# Altium PCB Split_Pumps2026.PcbDoc
Units mil, origin at the board's own origin, x right, y up, seen from the top; angles counter-clockwise.
Board outline 1640 x 1640 mil, 2 copper layers (Top Layer, Bottom Layer); 5 components, 5 nets, 13 pads, 0 vias.
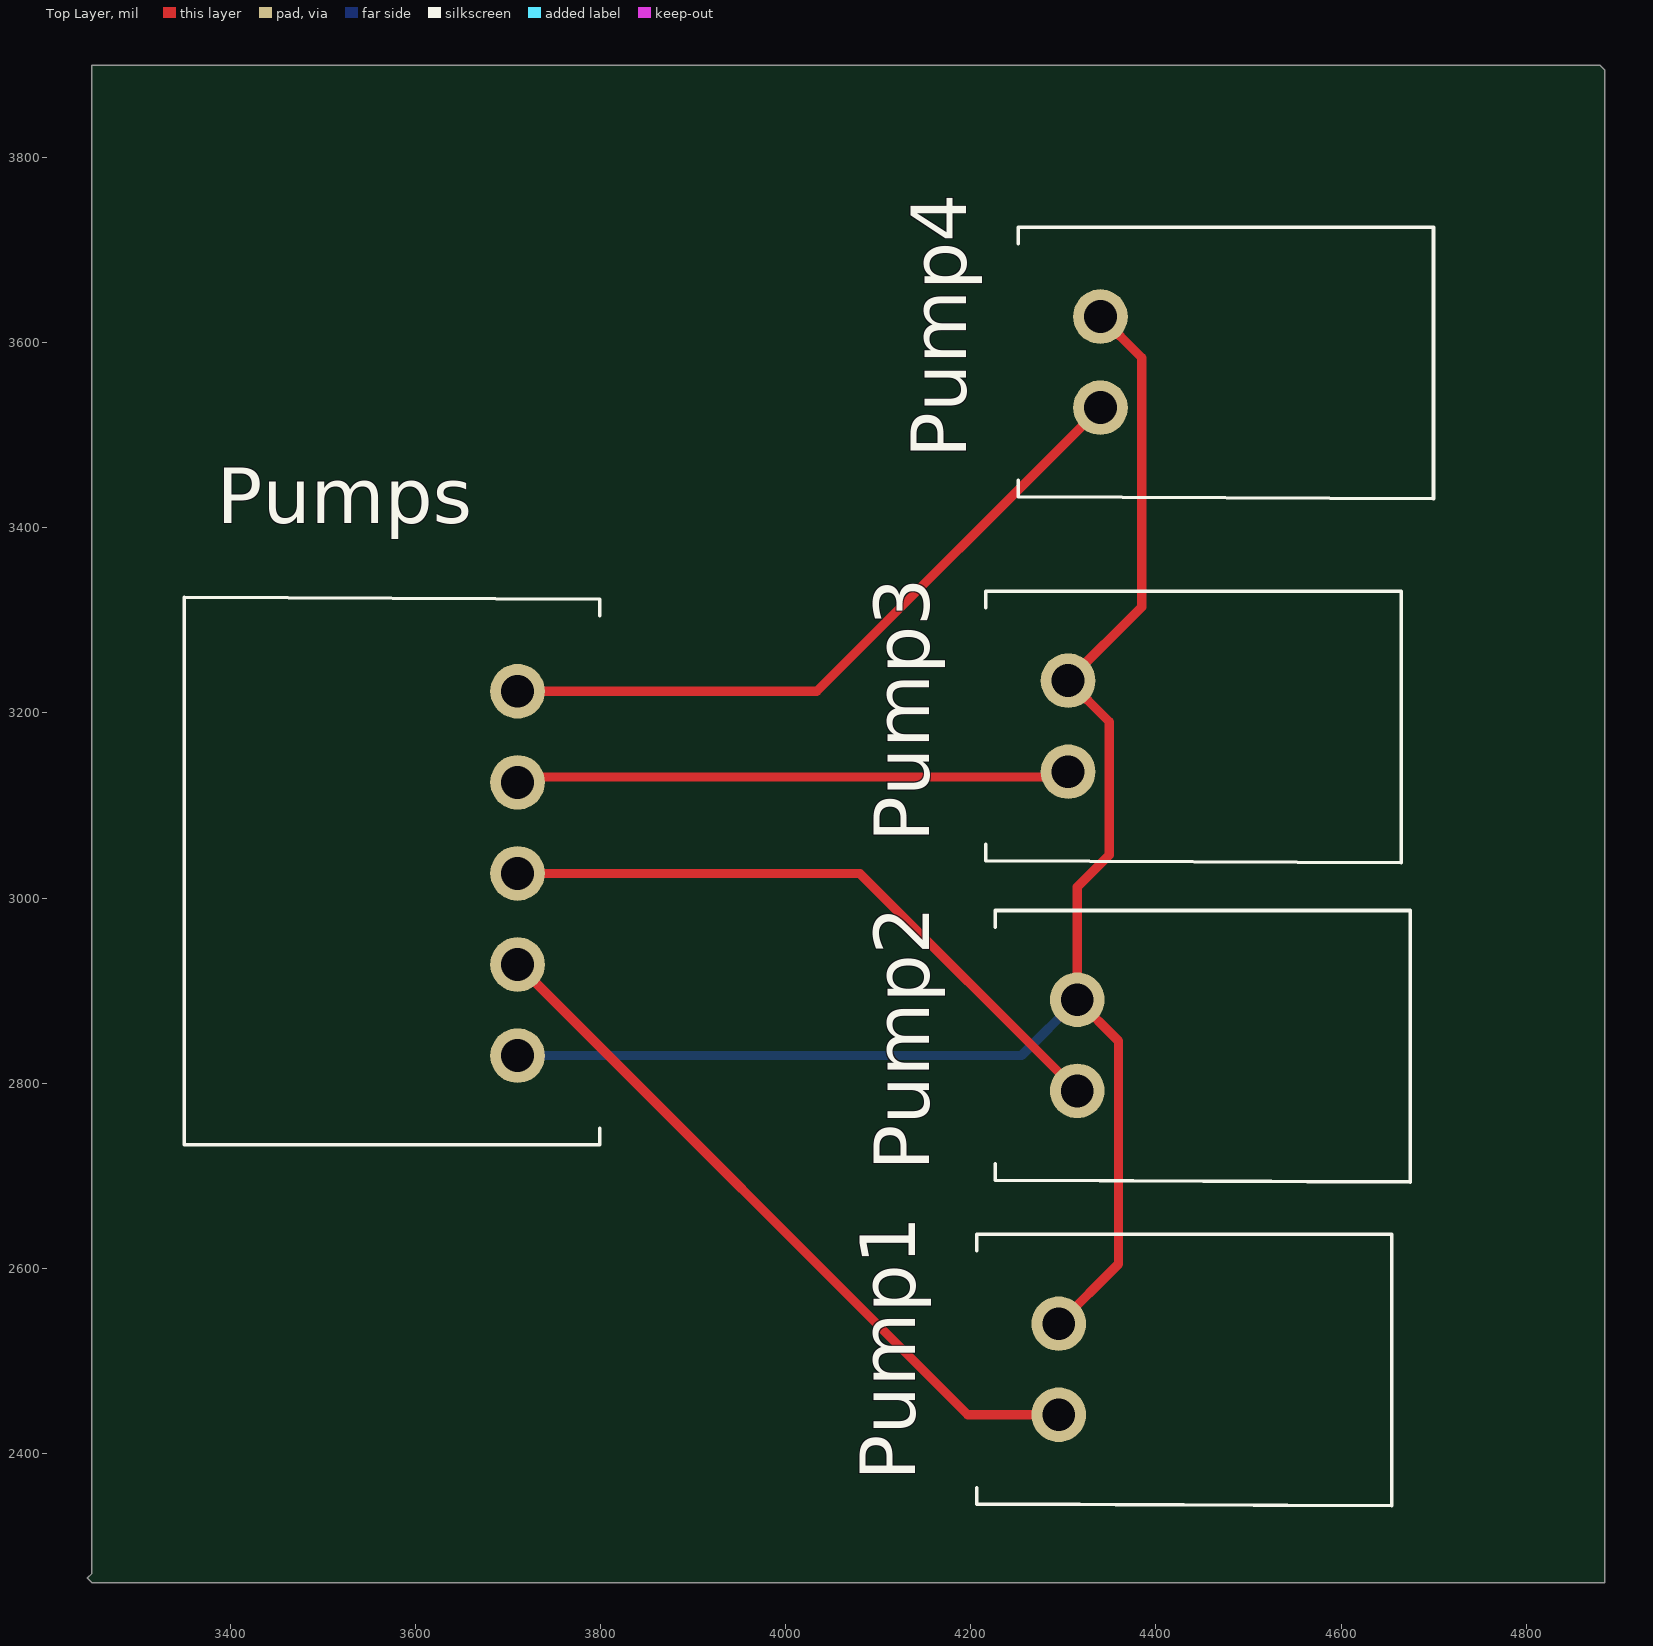
[diagram p0: Top Layer view]
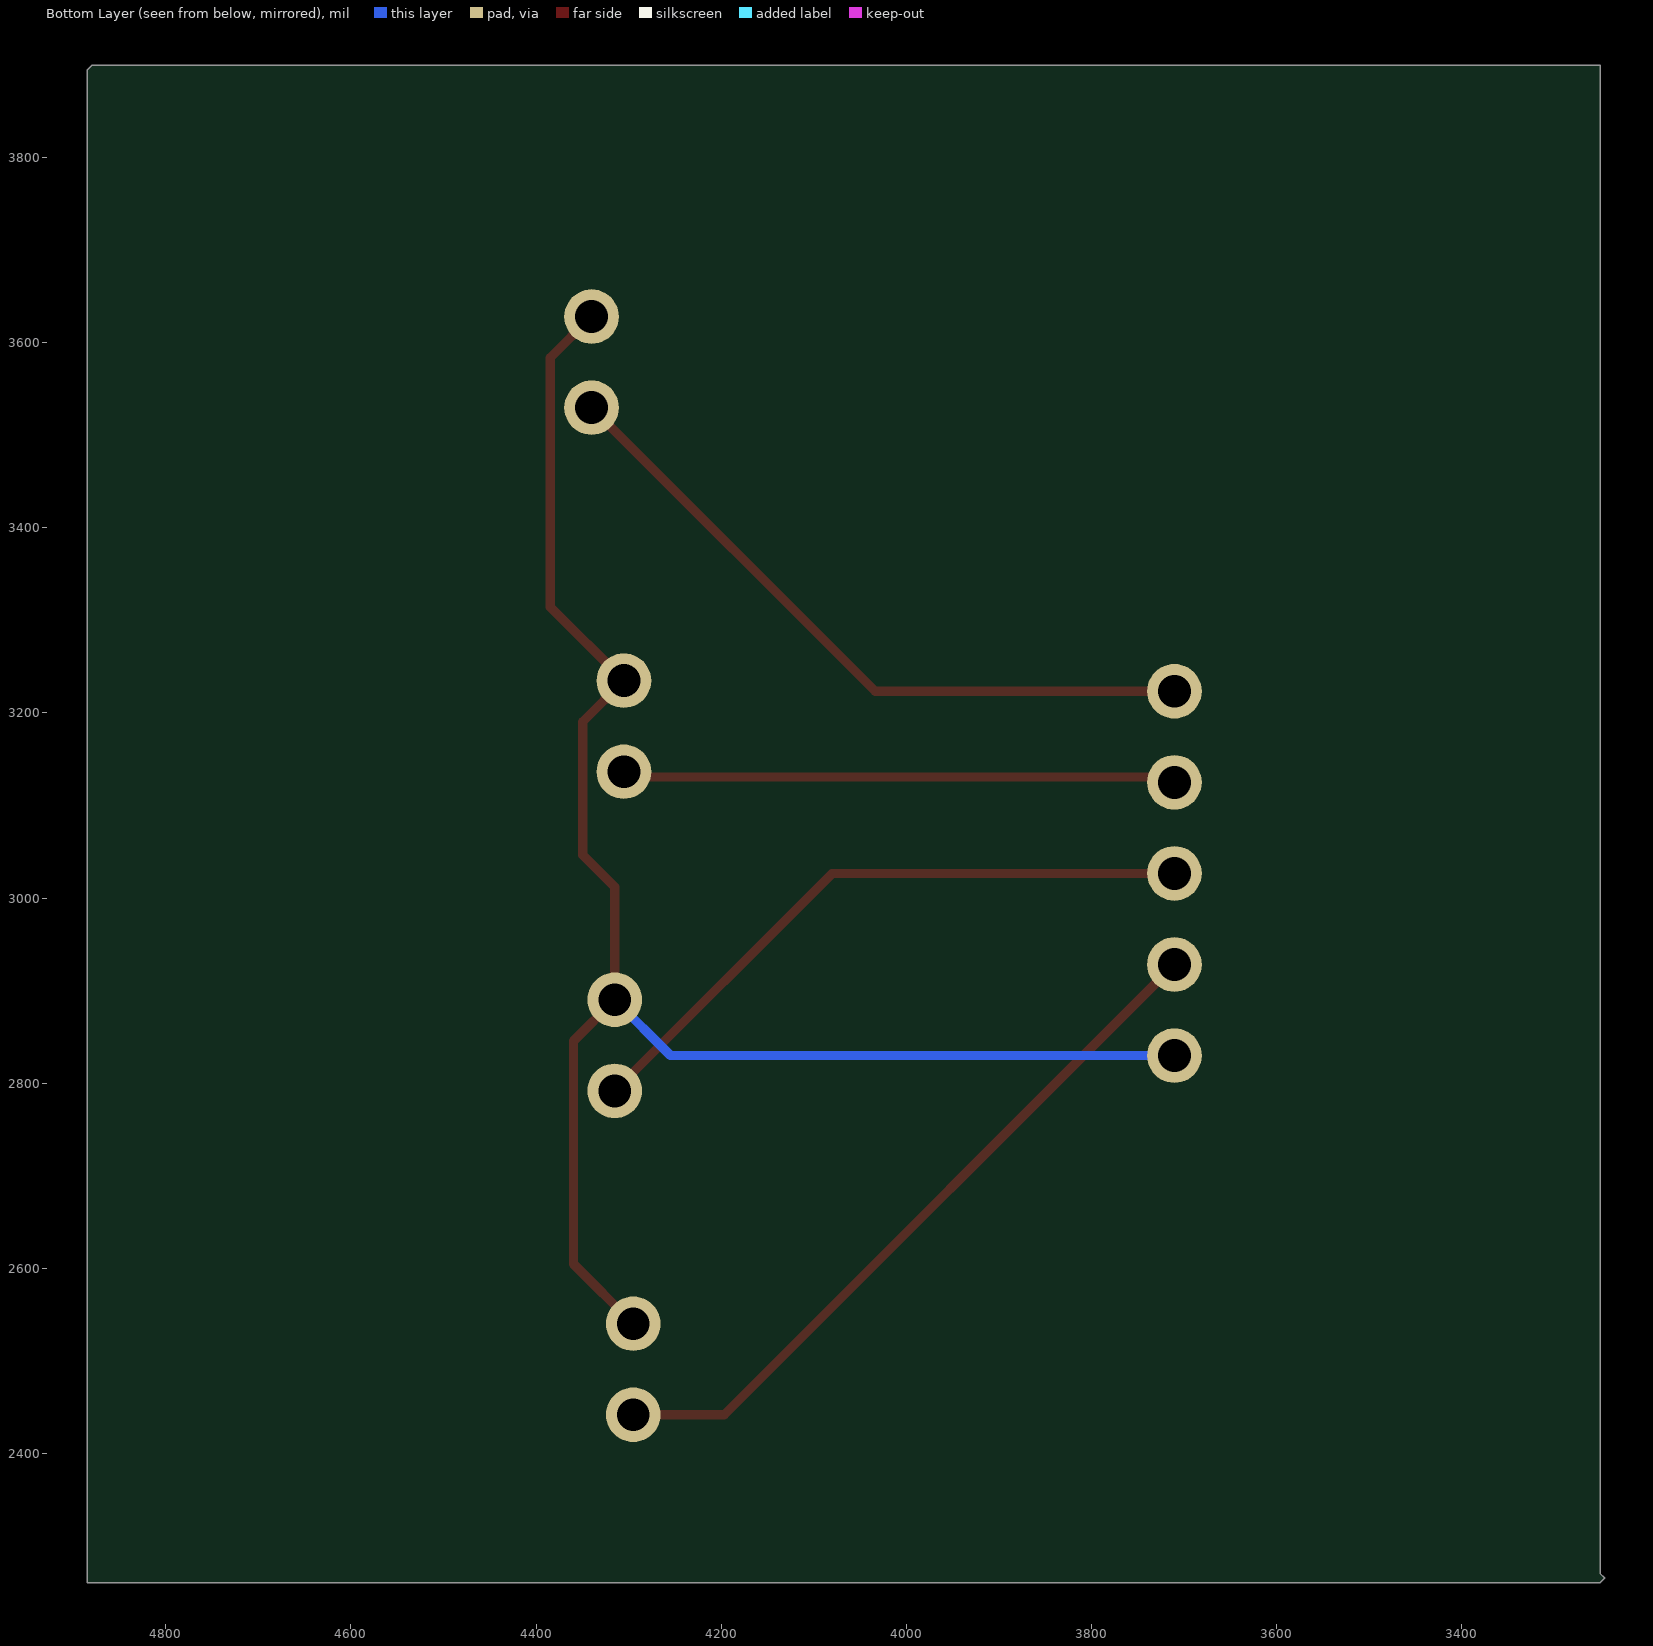
[diagram p1: Bottom Layer view, seen from below]
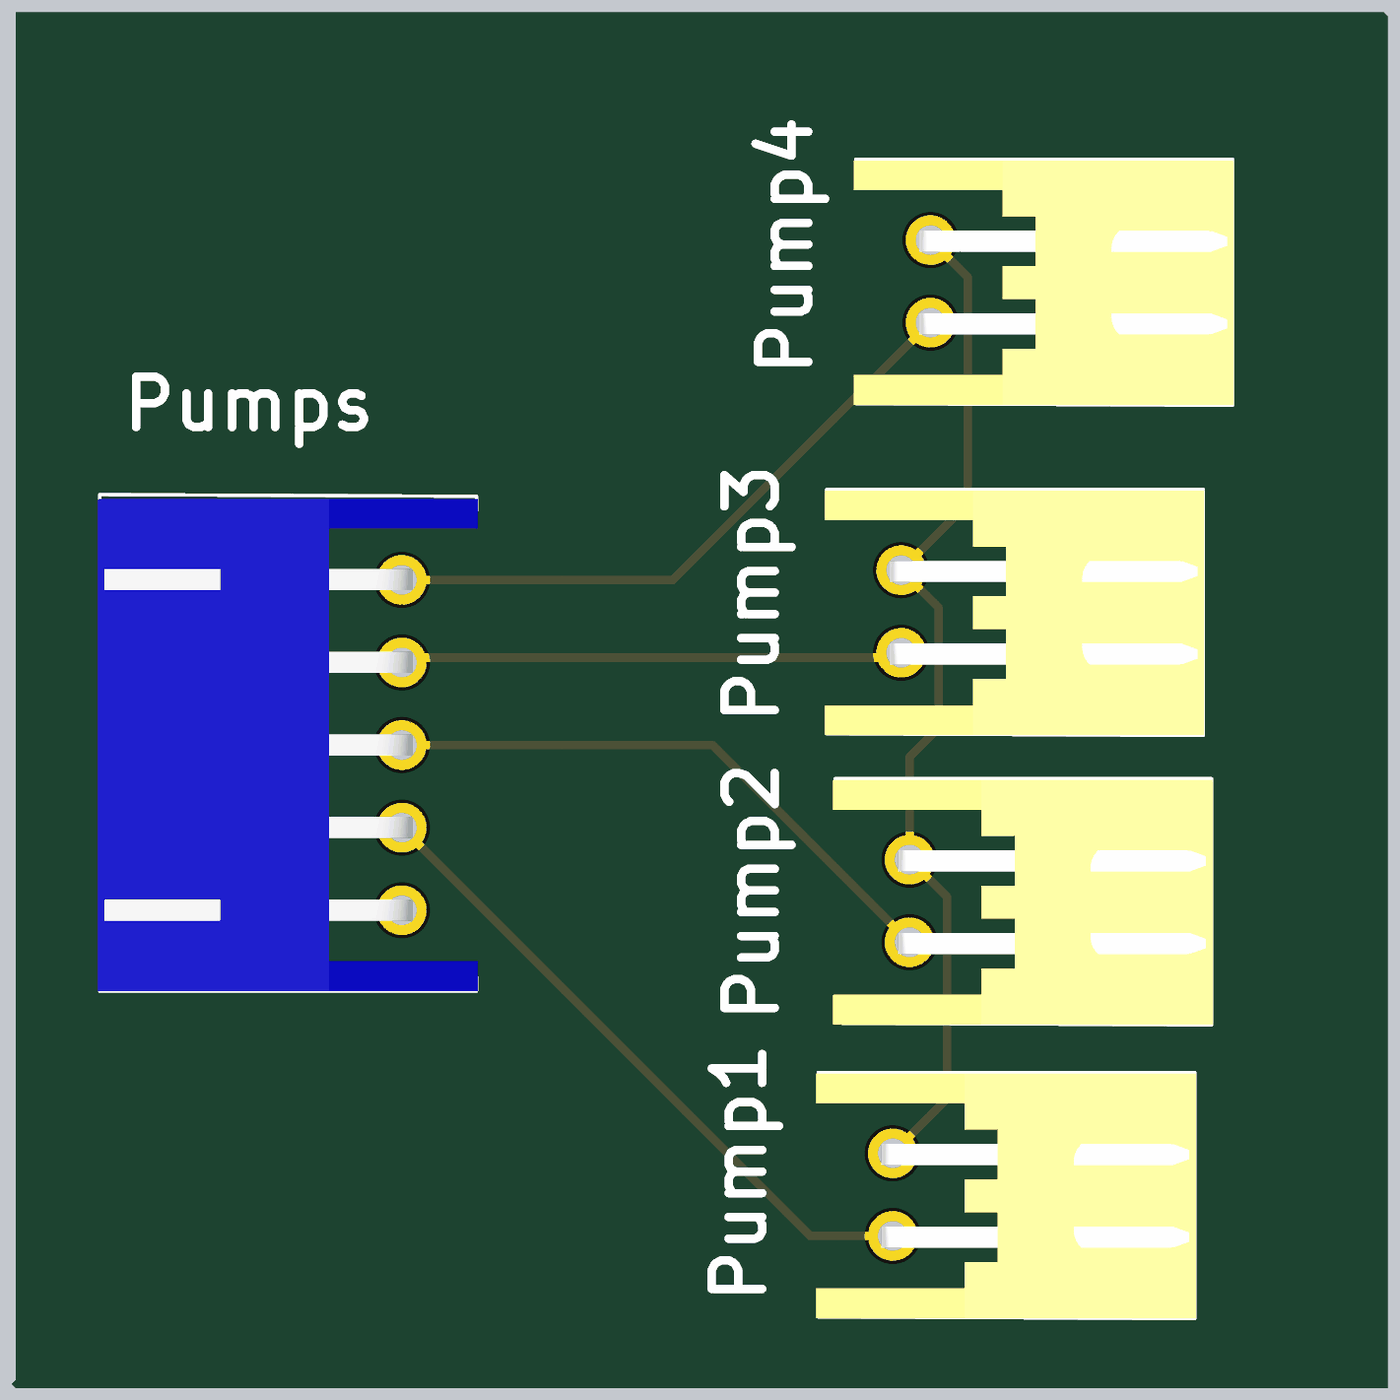
[diagram p2: 3D render of the assembled board from above, using the file's embedded part models]

## Layer stack, top to bottom
Top Solder: solder mask 0.4, Solder Resist, Dk 3.5
Top Layer: signal copper 1.4
Dielectric 1: dielectric 12.6, FR-4, Dk 4.8
Bottom Layer: signal copper 1.4
Bottom Solder: solder mask 0.4, Solder Resist, Dk 3.5

## Board outline
3250,2270 3245,2265 3250,2260 4885,2260 4885,3895 4880,3900 3250,3900

## Design rules (kind name [scope] priority, off if disabled: settings)
Clearance [All] p1: gap=10 ignorepadtopadclearanceinfootprint=FALSE
PolygonConnect [All] p1: connectstyle=Relief reliefconductorwidth=10 reliefentries=4 polygonreliefangle="90 Angle" airgapwidth=10
RoutingVias [All] p1: holewidth=28 width=50 viastyle="Through Hole" minholewidth=28 minwidth=50 maxholewidth=28 maxwidth=50
SolderMaskExpansion [All] p1: expansion=4 istentingtop=FALSE
SupplyNets "Schematic Supply Nets_1" [InNet('12V_P')] p1: voltage=0.000
Width [All] p1: maxlimit=10 minlimit=10 preferedwidth=10
30 further rules are at their usual default settings.

## Components (designator, comment, footprint, x,y, rotation, side; value= is the part's Value field where it differs from the comment)
Pump1 "Header 2H" S2B-XH-A 4295,2540 r270 top
Pump2 "Header 2H" S2B-XH-A 4315,2890 r270 top
Pump3 "Header 2H" S2B-XH-A 4305,3235 r270 top
Pump4 "Header 2H" S2B-XH-A 4340,3628.43 r270 top
Pumps "Header 5H" S5B-XH-A 3710,2829.72 r90 top

## Footprints (in the part's own frame and the unit in brackets; to place one, negate y for a bottom-side part, rotate by r counter-clockwise, add the part's x,y. Pads: shape width x height; smd on the part's side, far side on the other; paste and mask are expansions set on the pad)
S2B-XH-A [mm]
  round 1.5 hole 0.9: 1(0,0) 2(2.5,0)
  silkscreen extent -2.45,-2.26 5,9.14, body extent -2.41,-2.32 4.99,9.18, height 6.15
S5B-XH-A [mm]
  round 1.5 hole 0.9: 1(0,0) 2(2.5,0) 3(5,0) 4(7.5,0) 5(10,0)
  silkscreen extent -2.45,-2.26 12.58,9.14, body extent -2.45,-2.3 12.45,9.2, height 6.15

## Part data
Pump1 Pump2 Pump3 Pump4: "Header, 2-Pin, Right Angle", LatestRevisionDate=17-Jul-2002, LatestRevisionNote="Re-released for DXP Platform.", Publisher="Altium Limited"
Pumps: "Header, 5-Pin, Right Angle", LatestRevisionDate=17-Jul-2002, LatestRevisionNote="Re-released for DXP Platform.", Publisher="Altium Limited"

## Nets (pads, with @x,y where several pads share a name; then routed paths per layer and width w, separated by ;. In a path a pad name is that pad's centre, name@x,y a point inside that pad or via, vN(x,y) a via of type N, cw(c..) or ccw(c..) an arc to the next point about the centre after c; other vN are vias at no path point)
12V_P: Pump1.1 Pump2.1 Pump3.1 Pump4.1 Pumps.1 | length 1847.7
  Top Layer w10: Pump1.1 4359.53,2604.53 4359.53,2845.47 Pump2.1 4315,3011.88 4349.53,3046.41 4349.53,3190.47 Pump3.1 4384.53,3314.53 4384.53,3583.9 Pump4.1
  Bottom Layer w10: Pumps.1 4254.72,2829.72 Pump2.1
Pump_1: Pump1.2 Pumps.2 | length 786.5
  Top Layer w10: Pumps.2 4196.57,2441.57 Pump1.2
Pump_2: Pump2.2 Pumps.3 | length 702.3
  Top Layer w10: Pumps.3 4080,3026.57 Pump2.2
Pump_3: Pump3.2 Pumps.4 | length 599.8
  Top Layer w10: Pumps.4 3715.79,3130.79 4299.21,3130.79 Pump3.2
Pump_4: Pump4.2 Pumps.5 | length 757
  Top Layer w10: Pumps.5 4033.43,3223.43 Pump4.2